# EAGLE board boiler (EAGLE 9.6.2)
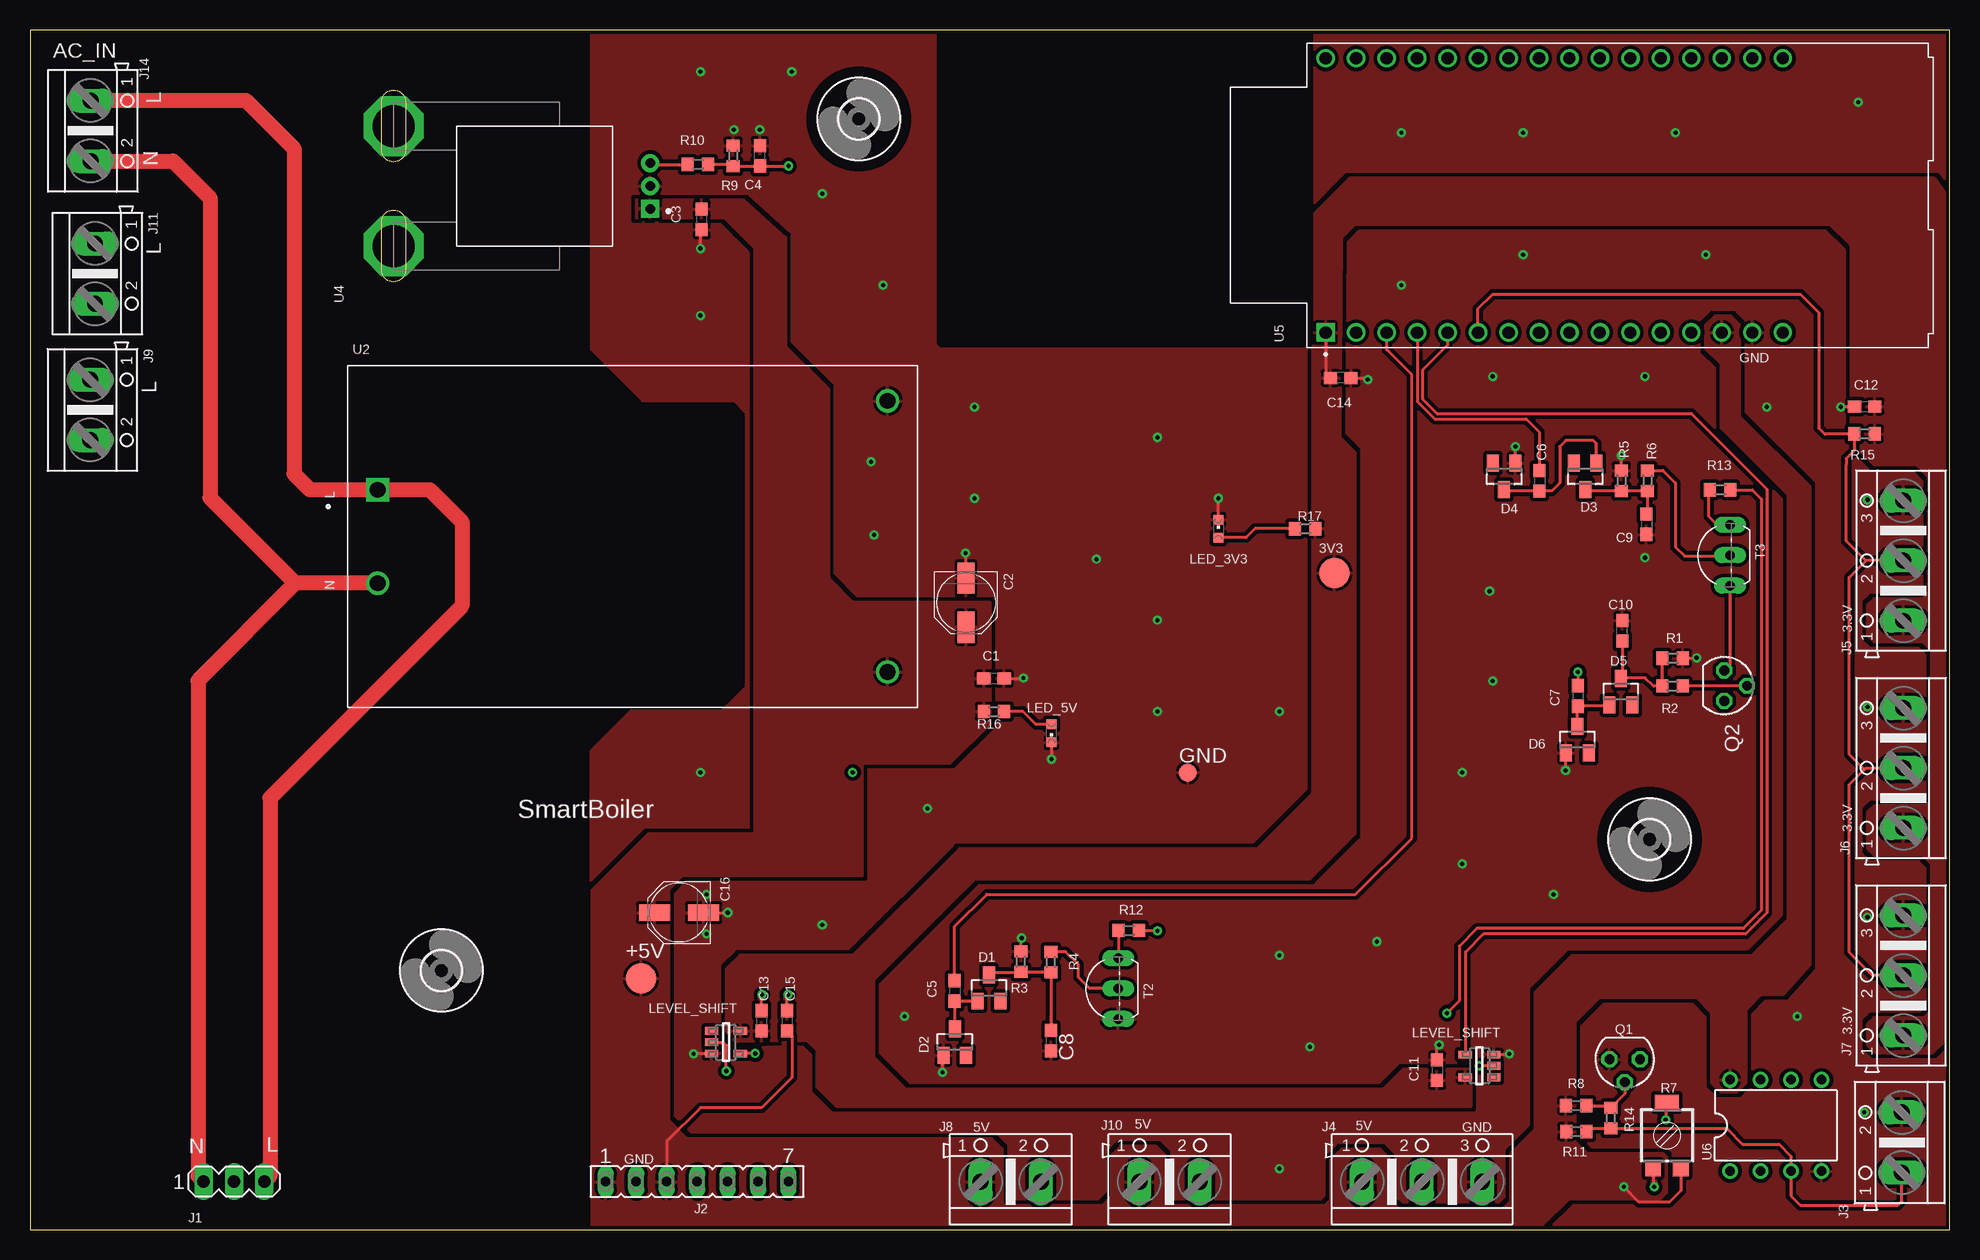
[diagram p0: board, top side]
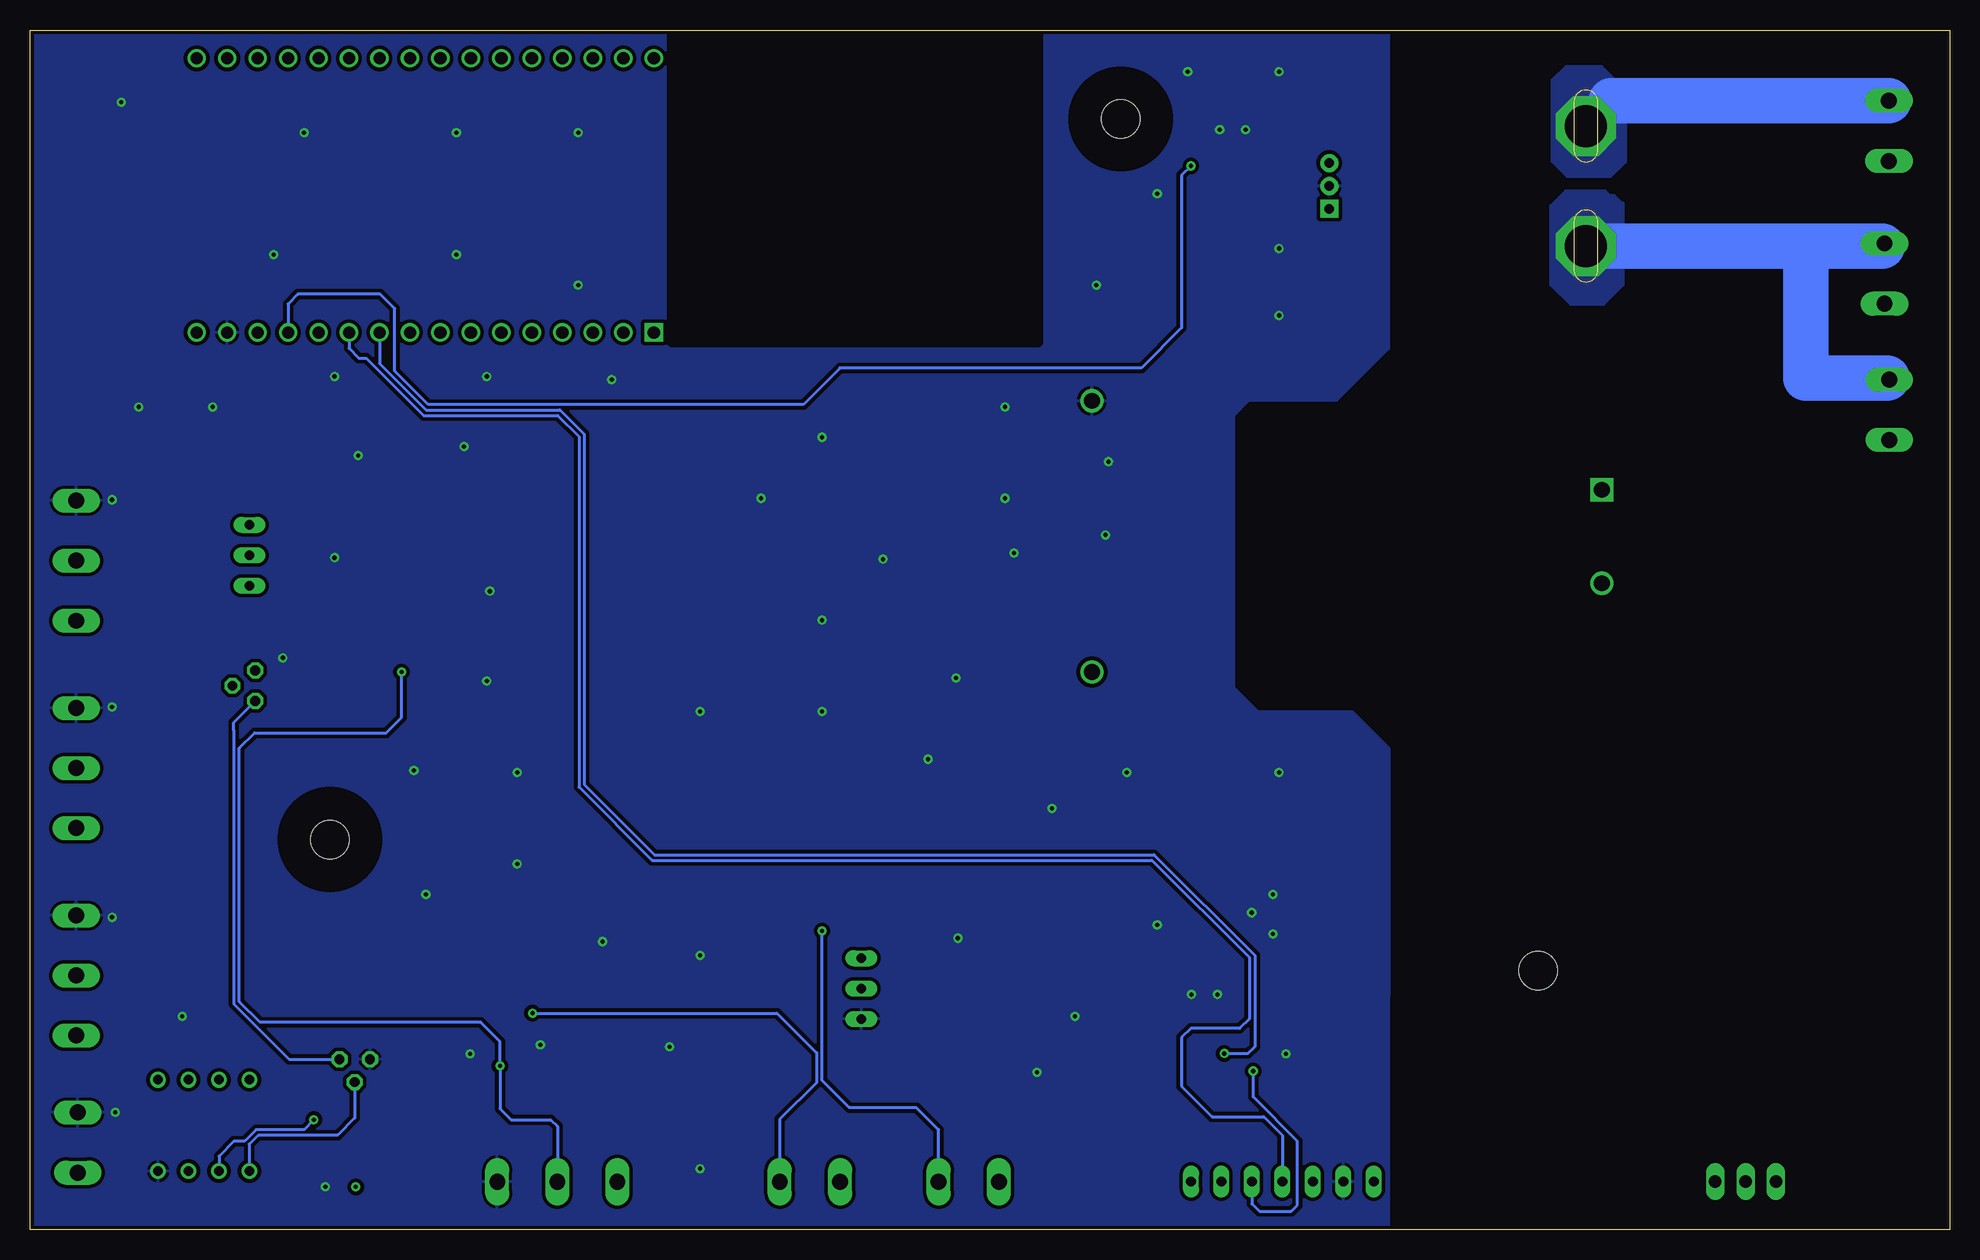
[diagram p1: board, bottom side, seen from below]

Size 160 x 100 mm. Coordinates in mm from the lower left corner, seen from the top.
Outline: 0,0 160,0 160,100 0,100 0,0
Copper layers (1*16): Top 0.035mm / dielectric 1.5mm / Bottom 0.035mm
Design rules "default *": minimum track width 10mil, minimum drill 0.35mm, track to track 8mil, track to pad 8mil, pad to pad 8mil, via to via 8mil, smd to smd 8mil, copper to edge 10mil, drill to drill 6mil, minimum pad ring 10mil, minimum via ring 8mil, stop-mask expansion 4mil, vias tented up to drill 0mil, thermal gap 10mil
Net classes: 1 HV: clearance 0.762 mm to class 0, clearance 0.762 mm
tRestrict: area 76,74 to 106.5,100
bRestrict: area 76,74 to 106.5,100

## Footprints (pad centres in the part's own frame; a part is rotated, then mirrored left to right if it is on the bottom)
B2,54 = smd 2.54 x 2.54: TP 0,0
C0603 = smd 1.1 x 1: 1 -0.85,0; 2 0.85,0
PANASONIC_C = smd 2.6 x 1.4: + 2.05,0; - -2.05,0
SOT23 = smd 1 x 1.4: 1 -0.95,-1.1; 2 0.95,-1.1; 3 0,1.1
TP15R = smd 1.5 x 1.5: TP 0,0
3,2 = hole 3.2: 0,0
MA03-1 = drill 1.016 long: 1 -2.54,0; 2 0,0; 3 2.54,0
FE07 = drill 0.813 long: 1 -7.62,0; 2 -5.08,0; 3 -2.54,0; 4 0,0; 5 2.54,0; 6 5.08,0; 7 7.62,0
AK500/2 = drill 1.321 long: 1 -2.515,0; 2 2.515,0
AK500/3 = drill 1.321 long: 1 -5.004,0; 2 0,0; 3 5.004,0
CHIPLED_0603 = smd 0.8 x 0.8: A 0,-0.75; C 0,0.75
SOT54E = drill 0.813 octagon: D -1.27,0; G 0,1.905; S 1.27,0
R0603 = smd 1 x 1.1: 1 -0.85,0; 2 0.85,0
RTRIM3314G = smd 1.3 x 1.3: 1 1.15,-2.75; 3 -1.15,-2.75 | smd 2 x 1.3: 2 0,2.75
TO92-EBC = drill 0.813 long: B 0,-1.27; C 2.54,-1.27; E -2.54,-1.27
DBV0005A_N = smd 1.1 x 0.65: 1 -1.2,0.95; 2 -1.2,0; 3 -1.2,-0.95; 4 1.2,-0.95; 5 1.2,0.95
CONV_HLK-10M05 = drill 1.3 square: 1 -21.25,3.9 | drill 1.3: 2 -21.25,-3.9; 3 21.25,11.3; 4 21.25,-11.3
XDCR_ACS758LCB-050B-PFF-T = drill 0.8 pad 1.5 square: 1 -1.91,-10.7 | drill 0.8 pad 1.5: 2 0,-10.7; 3 1.91,-10.7 | drill 3.5 pad 5 octagon: 4 5,10.7; 5 -5,10.7
MODULE_ESP32-C6-DEVKITC-1-N8 = drill 1.016 square: J1_1 -11.43,24.325 | drill 1.016: J1_2 -11.43,21.785; J1_3 -11.43,19.245; J1_4 -11.43,16.705; J1_5 -11.43,14.165; J1_6 -11.43,11.625; J1_7 -11.43,9.085; J1_8 -11.43,6.545; J1_9 -11.43,4.005; J1_10 -11.43,1.465; J1_11 -11.43,-1.075; J1_12 -11.43,-3.615; J1_13 -11.43,-6.155; J1_14 -11.43,-8.695; J1_15 -11.43,-11.235; J1_16 -11.43,-13.775; J3_1 11.43,24.325; J3_2 11.43,21.785; J3_3 11.43,19.245; J3_4 11.43,16.705; J3_5 11.43,14.165; J3_6 11.43,11.625; J3_7 11.43,9.085; J3_8 11.43,6.545; J3_9 11.43,4.005; J3_10 11.43,1.465; J3_11 11.43,-1.075; J3_12 11.43,-3.615; J3_13 11.43,-6.155; J3_14 11.43,-8.695; J3_15 11.43,-11.235; J3_16 11.43,-13.775
DIL08 = drill 0.813 pad 1.27: 1 -3.81,-3.81; 2 -1.27,-3.81; 3 1.27,-3.81; 4 3.81,-3.81; 5 3.81,3.81; 6 1.27,3.81; 7 -1.27,3.81; 8 -3.81,3.81

## Placement (x,y rotation side)
3V3  TPB2,54  [B2,54]  108.71,54.74 0 top
+5V  TPB2,54  [B2,54]  50.93,20.95 0 top
C1  100n  [C0603]  80.35,45.93 180 top
C2  100u  [PANASONIC_C]  78.02,52.26 270 top
C3  100n  [C0603]  55.98,84.2 270 top
C4  10n  [C0603]  60.83,89.51 90 top
C5  100nF  [C0603]  77.07,19.89 270 top
C6  1u  [C0603]  125.82,62.42 270 top
C7  22uF  [C0603]  129.03,44.48 270 top
C8  1uF  [C0603]  85.09,15.75 270 top
C9  1uF  [C0603]  134.75,58.8 270 top
C10  10uF  [C0603]  132.72,49.91 90 top
C11  100n  [C0603]  117.28,13.29 270 top
C12  100n  [C0603]  152.93,68.61 0 top
C13  100n  [C0603]  60.98,17.4 270 top
C14  100nF  [C0603]  109.25,71 180 top
C15  100n  [C0603]  63.09,17.4 270 top
C16  100u  [PANASONIC_C]  54.1,26.42 180 top
D1  BAT54  [SOT23]  79.94,20.14 0 top
D2  BAT54  [SOT23]  77.08,15.63 0 top
D3  BAT54  [SOT23]  129.63,62.8 180 top
D4  BAT54  [SOT23]  122.87,62.8 180 top
D5  BAT54  [SOT23]  132.6,44.84 0 top
D6  BAT54  [SOT23]  128.98,40.84 0 top
GND  PTR1TP15R  [TP15R]  96.52,38.1 0 top
H1  MOUNT-HOLE3.2  [3,2]  34.29,21.59 0 top
H2  MOUNT-HOLE3.2  [3,2]  69.09,92.58 0 top
H3  MOUNT-HOLE3.2  [3,2]  135,32.51 0 top
J1  J_MODEM_AC  [MA03-1]  17,4 0 top
J2  J_MODEM  [FE07]  55.61,4 0 top
J3  NTC  [AK500/2]  156.03,7.25 90 top
J4  FLOW  [AK500/3]  116.04,3.98 0 top
J5  TEMP_A  [AK500/3]  156.15,55.76 90 top
J6  TEMP_B  [AK500/3]  156.15,38.47 90 top
J7  TEMP_C  [AK500/3]  156.15,21.18 90 top
J8  SSR_DC_INT  [AK500/2]  81.75,3.98 0 top
J9  SSR_AC_INT  [AK500/2]  5.02,68.33 270 top
J10  SSR_DC_EXE  [AK500/2]  94.99,3.98 0 top
J11  SSR_AC_EXE  [AK500/2]  5.42,79.69 270 top
J14  J_AC_IN  [AK500/2]  5.05,91.59 270 top
LED_3V3  GREEN  [CHIPLED_0603]  99.06,58.42 0 top
LED_5V  GREEN  [CHIPLED_0603]  85.15,41.37 180 top
Q1  BS170  [SOT54E]  132.93,14.19 180 top
Q2  BS170  [SOT54E]  141.22,45.34 270 top
R1  100k  [R0603]  136.93,47.62 180 top
R2  1k  [R0603]  136.91,45.3 0 top
R3  100k  [R0603]  82.59,22.34 270 top
R4  1k  [R0603]  85.1,22.3 90 top
R5  10k  [R0603]  132.65,62.42 270 top
R6  1k  [R0603]  134.82,62.42 90 top
R7  10k  [RTRIM3314G]  136.46,7.84 0 top
R8  4.7k  [R0603]  128.88,10.33 180 top
R9  3.3k  [R0603]  58.61,89.51 270 top
R10  1.8k  [R0603]  55.68,88.79 180 top
R11  10k  [R0603]  128.9,8.16 180 top
R12  470  [R0603]  91.59,24.93 180 top
R13  470  [R0603]  140.88,61.67 180 top
R14  470k  [R0603]  131.76,9.29 270 top
R15  4.7k  [R0603]  152.93,66.33 0 top
R16  1k  [R0603]  80.35,43.18 180 top
R17  330  [R0603]  106.3,58.42 0 top
T2  [TO92-EBC]  89.43,20.08 90 top
T3  [TO92-EBC]  140.43,56.21 90 top
U1  SN74LV1T34DBVR  [DBV0005A_N]  120.83,13.63 180 top
U2  HLK-10M05  [CONV_HLK-10M05]  50.23,57.78 0 top
U3  SN74LV1T34DBVR  [DBV0005A_N]  58.01,15.62 0 top
U4  ACS758LCB-050B-PFF-T  [XDCR_ACS758LCB-050B-PFF-T]  41,87 90 top
U5  ESP32-C6-DEVKITC-1-N8  [MODULE_ESP32-C6-DEVKITC-1-N8]  132.33,86.21 90 top
U6  LM393N  [DIL08]  145.52,8.68 0 top

## Library data of the parts
3V3 +5V GND = testpad
C1-C16 = rcl; SPICEPREFIX: C
D1-D6 = diode
H1-H3 = holes
J1 = con-lstb; OC_FARNELL: unknown; OC_NEWARK: unknown
J2 = con-lsta; OC_FARNELL: unknown; OC_NEWARK: unknown
J3-J11 J14 = con-ptr500; OC_FARNELL: unknown; OC_NEWARK: unknown
LED_3V3 LED_5V = led
Q1 Q2 = transistor-small-signal
R1-R6 R8-R17 = rcl; SPICEPREFIX: R
R7 = rcl; SPICEMODEL: X; SPICEPREFIXL: POT
T2 T3 = transistor-neu-to92
U1 U3 = Elad; COPYRIGHT: Copyright (C) 2026 Ultra Librarian. All rights reserved.; DATASHEET: https://www.ti.com/lit/gpn/sn74lv1t34; DESCRIPTION: Single Power Supply BUFFER Logic Level Shifter (no enable) 5-SOT-23 -40 to 125; MANUFACTURER_NAME: Texas Instruments; MANUFACTURER_PART_NUMBER: SN74LV1T34DBVR; REFDES: RefDes; TYPE: TYPE
U2 = HLK-10M05; AVAILABILITY: Not in stock; CHECK_PRICES: https://www.snapeda.com/parts/HLK-10M05/Hi-link/view-part/?ref=eda; DESCRIPTION: 10W Ultra-Compact Power Module; MF: Hi-link; MP: HLK-10M05; PACKAGE: Package; PRICE: None; SNAPEDA_LINK: https://www.snapeda.com/parts/HLK-10M05/Hi-link/view-part/?ref=snap
U4 = ACS758LCB-050B-PFF-T; AVAILABILITY: In Stock; CHECK_PRICES: https://www.snapeda.com/parts/ACS758LCB-050B-PFF-T/Allegro/view-part/?ref=eda; DESCRIPTION: Current Sensor 50A 1 Channel Hall Effect, Open Loop Bidirectional 5-CB Formed Leads, PFF; MF: Allegro MicroSystems LLC; MP: ACS758LCB-050B-PFF-T; PACKAGE: 5-CB-5 Allegro MicroSystems LLC; PRICE: None; SNAPEDA_LINK: https://www.snapeda.com/parts/ACS758LCB-050B-PFF-T/Allegro/view-part/?ref=snap
U5 = ESP32-C6-DEVKITC-1-N8; MANUFACTURER: Espressif Systems; PARTREV: 1.3; STANDARD: Manufacturer Recommendations
U6 = linear

## Nets
+3V3: 3V3.TP C11.2 C12.2 C13.2 C14.2 J5.1 J6.1 J7.1 R15.2 R17.2 U1.5 U3.5 U5.J1_1
+5V: +5V.TP C1.2 C2.+ C3.1 C15.2 C16.+ J2.1 J2.3 J4.1 J8.1 J10.1 R7.1 R8.2 R11.2 R16.2 U2.4 U4.1 U5.J1_14 U6.8
GND: C1.1 C2.- C3.2 C4.2 C8.2 C9.2 C10.2 C11.1 C12.1 C13.1 C14.1 C15.1 C16.- D2.1 D4.1 D6.1 GND.TP J2.2 J3.2 J4.3 J5.3 J6.3 J7.3 LED_3V3.C LED_5V.C Q1.S R1.1 R3.1 R5.1 R7.3 R9.1 T2.E U1.3 U2.3 U3.3 U4.2 U5.J1_15 U6.4
GND_J3_1: U5.J3_1
GND_J3_12: U5.J3_12
GND_J3_15: U5.J3_15
GPIO2: U5.J1_12
GPIO3: C4.1 R9.2 R10.1 U5.J1_13
GPIO4: C5.1 U5.J1_3
GPIO5: C6.1 U5.J1_4
GPIO6: U1.4 U5.J1_5
GPIO7: J5.2 J6.2 J7.2 R15.1 U5.J1_6
GPIO10_RX: U3.4 U5.J1_10
GPIO11_TX: J2.4 U5.J1_11
HEATER_EXE: J11.2
HEATER_INT: J9.2
L_DIST [HV]: J9.1 J11.1 U4.5
L_NET [HV]: J1.3 J14.1 U2.1 U4.4
MODE: J2.6
N$1: C7.1 J4.2 U1.2
N$2: C5.2 D1.1 D2.3
N$3: C8.1 D1.3 R3.2 R4.1
N$4: R4.2 T2.B
N$5: R10.2 U4.3
N$6: C7.2 D5.1 D6.3
N$7: C10.1 D5.3 R1.2 R2.1
N$8: Q2.G R2.2
N$9: LED_5V.A R16.1
N$10: C6.2 D3.1 D4.3
N$11: C9.1 D3.3 R5.2 R6.1
N$12: R6.2 T3.B
N$13: Q2.D T3.E
N$14: R13.2 T3.C
N$15: R12.2 T2.C
N$17: R7.2 U6.2
N$18: Q1.D Q2.S
N$19: J3.1 R11.1 R14.2 U6.3
N$20: J8.2 R12.1
N$21: J10.2 R13.1
N$22: LED_3V3.A R17.1
N$23: Q1.G R8.1 R14.1 U6.1
N_NET: J1.1 J14.2 U2.2
NC/RST: J2.7
TX_MODEM: J2.5 U3.2

## Tracks (layer width: path | path; a pad name or v marks a point on that pad's centre or on a via)
+3V3
  Top 0.254: U5.J1_1 108,71.4 C14.2
  pour Top (isolate 0.305): 159.64,15.75 159.64,86.36 158.75,87.63 109.99,87.63 106.88,84.51 106.88,36.37 102.26,31.75 77.47,31.75 68.58,22.86 59.18,22.86 58.04,21.72 58.04,16.5 58.78,15.68 64.75,15.77 65.6,14.92 65.6,11.87 67.18,10.29 120.14,10.29 120.14,13.34 114.43,13.34 112.78,11.68 73.03,11.68 70.36,14.35 70.36,20.83 78.76,29.23 106.7,29.23 110.49,33.02 110.49,64.77 109.22,66.04 109.35,82.68 110.49,83.82 149.99,83.82 151.76,82.04 151.76,65.66 153.67,63.75 157.23,63.75 158.24,62.74 158.24,53.09 157.73,52.58 153.67,52.58 153.16,52.07 153.16,49.53 153.67,49.02 157.73,49.02 158.5,48.26 158.5,35.81 157.99,35.31 153.67,35.31 153.16,34.8 153.16,31.75 153.67,31.24 157.73,31.24 158.5,30.48 158.5,18.29 157.86,17.65 153.67,17.65 153.16,17.14 153.16,15.37 153.8,14.73 158.62,14.73
+5V  (via drill 0.35)
  Top 0.254: 55.56,85.09 55.94,85.09 C3.1 | C15.2 63.5,16.14 63.5,12.7 60.96,10.16 55.88,10.16 53.07,7.35 J2.3 | R7.1 137.61,3.24 136.65,2.29 134.11,2.29 v132.84,3.56
  pour Top (isolate 0.305): 50.55,85.85 59.48,85.85 62.99,82.7 62.99,73.66 66.55,70.1 66.55,54.36 68.58,52.32 80.01,52.32 80.01,42.16 76.71,38.86 69.34,38.86 69.34,29.46 54.36,29.46 53.21,28.32 53.21,9.14 54.74,7.62 80.14,7.62 81.03,6.73 81.03,2.29 81.28,2.03 89.41,2.03 90.17,2.79 90.17,6.22 90.93,6.99 93.85,6.99 94.61,6.22 94.61,2.29 94.87,2.03 107.95,2.03 108.46,2.54 108.46,5.84 109.35,6.73 112.52,6.73 113.28,5.97 113.28,2.54 114.05,1.78 122.81,1.78 123.44,2.41 123.44,6.35 125.48,8.38 125.48,19.81 128.52,22.86 143.51,22.86 146.56,25.91 146.56,61.21 140.97,66.8 140.97,72.14 139.7,73.41 139.7,75.44 140.46,76.2 141.73,76.2 142.49,75.44 142.49,67.82 148.34,61.98 148.34,22.01 146.13,19.56 144.27,19.56 143,18.29 143,12.19 142.24,11.43 140.97,11.43 140.21,12.19 140.21,18.03 138.94,19.3 130.81,19.3 128.78,17.27 128.78,7.37 129.79,6.35 136.14,6.35 136.4,6.1 136.4,3.05 135.89,2.54 128.27,2.54 125.98,0.25 46.86,0.25 46.86,28.32 51.56,33.02 60.45,33.02 60.45,81.79 57.91,84.33 50.55,84.33
GND  (via drill 0.35)
  Top 0.254: D4.1 v123.82,65.28 v123.83,65.28 | R5.1 v132.65,64.52 | v128,38.26 128,39.71 D6.1 | R1.1 137.82,47.66 v138.92,47.66 | C12.1 152.05,68.58 v150.94,68.58 | C11.1 117.28,15.23 v117.46,15.4 | U1.3 123.25,14.58 v123.3,14.64 | R3.1 82.59,24.22 v82.66,24.29 | v76.06,13.12 76.06,14.46 D2.1 | v55.3,14.63 55.34,14.67 U3.3 | v55.88,81.79 55.88,83.25 C3.2 | C14.1 111.37,71 v111.51,70.87 | C1.1 82.76,45.93 v82.8,45.97 | C2.- 78.02,56.35 v77.98,56.39 | C13.1 60.98,19.55 v61.02,19.59 | C15.1 63.09,19.5 v63.18,19.59 | C16.- v58.17,26.42 | LED_3V3.C v99.06,60.96 | LED_5V.C v85.15,39.21 | R7.3 135.31,3.63 v135.38,3.56
  other vias: 58.67,91.69 60.83,91.69 78.74,68.58 71.12,78.74 55.88,76.2 124.46,81.28 139.7,81.28 134.62,56.01 121.92,45.72 78.74,60.96 93.98,66.04 93.98,43.18 104.14,22.86 119.38,30.48 121.67,53.21 147.32,17.78 144.78,68.58 134.62,71.12 121.92,71.12 114.3,78.74 114.3,91.44 124.46,91.44 137.16,91.44 152.4,93.98 104.14,5.08 106.68,15.24 66.04,25.4 56.39,24.64 55.88,38.1 70.36,57.91 70.1,64.01 55.88,96.52 63.5,96.52 66.04,86.36 88.9,55.88 68.58,38.1 74.82,35.1 104.14,43.18 119.38,38.1 93.98,50.8 72.9,17.78 127,27.94 153.16,60.83 153.16,43.56 153.16,26.04 152.91,9.78 112.27,24 56.39,27.94
  pour Bottom (isolate 0.305, rank 6): 46.75,101 46.75,73.42 51.09,69.09 58.42,69.09 59.69,67.82 59.69,45.21 57.66,43.18 49.78,43.18 46.74,40.13 46.75,-1.25 161,-1.25 161,101
  pour Top (isolate 0.305, rank 6): 46.75,101 46.75,73.39 51.05,69.09 58.67,69.09 59.69,68.07 59.69,45.21 57.66,43.18 50.04,43.18 46.74,39.88 46.75,-1 161,-1 161,101
GPIO3  (via drill 0.35)
  Top 0.254: R10.1 58.48,88.79 R9.2 C4.1 v63.23,88.66
  Bottom 0.254: v63.23,88.66 64.01,87.88 64.01,75.18 67.36,71.83 92.5,71.83 95.54,68.78 126.81,68.78 129.6,71.58 129.6,76.77 130.81,77.98 137.67,77.98 138.49,77.16 U5.J1_13
GPIO4
  Top 0.254: C5.1 77.07,25.25 79.76,27.94 110.49,27.94 115.17,32.62 115.17,71.27 113.08,73.35 U5.J1_3
GPIO5
  Top 0.254: C6.1 125.82,66.46 124.71,67.56 117.09,67.56 115.62,69.03 U5.J1_4
GPIO6
  Top 0.254: U5.J1_5 118.17,73.72 116.08,71.63 116.08,69.22 117.28,68.02 138.48,68.02 144.78,61.72 144.78,26.42 143,24.64 121.16,24.64 119.62,23.11 119.62,15.74 U1.4
GPIO7
  Top 0.254: U5.J1_6 120.7,76.76 121.92,77.98 147.57,77.98 149.1,76.45 149.1,66.8 149.61,66.29 152.05,66.29 R15.1 152.08,64.96 151.38,64.26 151.38,63.75 151.38,57.4 153.03,55.76 153.04,55.76 | J7.2 153.57,21.18 151.64,23.11 151.64,37.08 152.91,38.35 | 152.91,38.35 153.02,38.47 J6.2 | 152.91,38.35 151.64,39.62 151.64,54.36 153.04,55.76 | J5.2 153.04,55.76
GPIO10_RX  (via drill 0.35)
  Top 0.254: v60.45,14.67 60.26,14.67 U3.4
  Bottom 0.254: v60.45,14.67 58.48,14.67 57.91,15.24 57.91,22.86 66.29,31.24 107.95,31.24 113.79,37.08 113.79,66.29 115.82,68.33 127,68.33 130.87,72.19 U5.J1_10
GPIO11_TX
  Bottom 0.254: U5.J1_11 133.41,73.46 132.59,72.64 131.97,72.64 127.19,67.87 116.01,67.87 114.25,66.11 114.25,36.9 108.14,30.79 66.48,30.79 58.37,22.67 58.37,17.58 59.18,16.76 63.25,16.76 64.01,16 64.01,11.94 61.47,9.4 57.15,9.4 55.61,7.86 J2.4
L_DIST
  Bottom 2.54: 5.62,82 J11.1 | J9.1 5.17,71
  Bottom 3.81: U4.5 12,82 | 12,82 5.62,82 | 5.17,71 12,71 12,82
  pour Bottom (no thermals): 27.18,85.6 27.18,78.74 28.83,77.09 31.62,77.09 33.27,78.74 33.27,85.34 32,86.61 28.7,86.61 28.32,86.23 27.94,86.23 27.3,85.6
L_NET
  Top 1.27: J1.3 20,4.46 20,36 36,52 36,59 33.32,61.68 U2.1 23.32,61.68 22,63 22,90.11 18,94.11 J14.1
  Bottom 2.54: 28.2,94.11 U4.4
  Bottom 3.81: J14.1 18,94.11 28.2,94.11
  pour Bottom (no thermals): 27,95 29,97 32,97 33.15,95.85 33.15,89.03 31.89,87.77 28.23,87.77 27,89
N$1  (via drill 0.35)
  Top 0.254: U1.2 v120.82,13.63 | v129.03,46.48 C7.1
  Bottom 0.254: v129.03,46.48 129.03,42.67 130.3,41.4 141.28,41.4 142.54,40.13 142.54,18.98 140.83,17.27 122.43,17.27 120.82,15.67 v120.82,13.63 120.82,10.08 119.89,9.14 116.59,9.14 116.04,8.6 J4.2
N$2
  Top 0.254: D2.3 77.07,16.75 C5.2 D1.1
N$3
  Top 0.254: 82.64,21.45 R4.1 85.1,17.78 85.1,17.49 C8.1 | 82.64,21.45 R3.2 | D1.3 80.15,21.45 82.64,21.45
N$4
  Top 0.254: T2.B 88.33,20.08 87.38,21.04 87.38,22.1 86.33,23.15 R4.2
N$5
  Top 0.254: R10.2 54.75,88.75 51.81,88.75 U4.3
N$6
  Top 0.254: D5.1 131.54,43.63 C7.2 128.98,43.58 D6.3
N$7
  Top 0.254: R1.2 136.06,47.6 R2.1 135.32,45.3 134.62,46 133,46 D5.3 132.72,46.05 C10.1
N$8
  Top 0.254: R2.2 137.8,45.34 Q2.G
N$9
  Top 0.254: R16.1 82.78,43.18 83.84,42.12 LED_5V.A
N$10
  Top 0.254: D4.3 123,61.57 C6.2 126.85,61.57 127.51,62.23 127.51,65.28 128.02,65.79 130.3,65.79 130.58,65.51 D3.1
N$11
  Top 0.254: D3.3 129.75,61.57 R5.2 R6.1 134.82,59.72 C9.1
N$12
  Top 0.254: R6.2 136.12,63.27 137.16,62.23 137.16,56.9 137.92,56.13 141.62,56.13 T3.B
N$13
  Top 0.254: T3.E 141.7,47.09 Q2.D
N$14
  Top 0.254: T3.C 140.64,58.75 139.95,59.44 139.95,61.59 R13.2
N$15
  Top 0.254: R12.2 90.74,22.67 T2.C
N$17  (via drill 0.35)
  Top 0.254: R7.2 136.34,10.47 v136.34,9.15
  Bottom 0.254: v136.34,9.15 137.16,8.33 141.16,8.33 142.12,7.37 143,7.37 144.25,6.12 U6.2
N$18
  Bottom 0.254: Q1.D 138.4,14.19 143,18.8 143,40.64 143,41.61 143,42.29 Q2.S
N$19
  Top 0.254: R11.1 130.03,8.44 R14.2 141.42,8.44 142.75,7.11 145.8,7.11 146.79,6.12 U6.3 146.79,2.82 147.57,2.03 155.7,2.03 156.03,2.36 J3.1
N$20  (via drill 0.35)
  Top 0.254: v93.98,24.89 92.49,24.89 R12.1
  Bottom 0.254: J8.2 84.27,8.32 86.11,10.16 91.69,10.16 93.98,12.45 v93.98,24.89
N$21  (via drill 0.35)
  Top 0.254: R13.1 143.57,61.67 144.32,60.91 144.32,26.61 142.81,25.09 120.6,25.09 119.13,23.62 119.13,19.05 v118.11,18.03
  Bottom 0.254: v118.11,18.03 97.74,18.03 94.44,14.73 94.44,12.24 97.5,9.18 J10.2
N$22
  Top 0.254: LED_3V3.A 101.36,57.67 102.11,58.42 R17.1
N$23
  Top 0.254: R8.1 131.57,10.33 R14.1 132.93,11.31 Q1.G
  Bottom 0.254: Q1.G 132.93,9.31 134.37,7.87 140.97,7.87 141.73,7.11 141.73,4.89 U6.1
N_NET
  Top 1.27: J14.2 11.93,89.08 15,86 15,61 22.12,53.88 | U2.2 22.12,53.88 | 22.12,53.88 14,45.76 14,4.46 J1.1
TX_MODEM  (via drill 0.35)
  Top 0.254: v58.04,13.21 58.04,15.37 57.79,15.62 U3.2
  Bottom 0.254: J2.5 58.15,2.14 57.53,1.52 54.86,1.52 54.36,2.03 54.36,7.37 58.04,11.05 v58.04,13.21

## Text on the board
tPlace: AC_IN | L | N | L | GND | L | L | N | 3.3V | SmartBoiler | 3.3V | LEVEL_SHIFT | LEVEL_SHIFT | 3.3V | 5V | 5V | 5V | GND | N | L | GND